# EAGLE board mcu (EAGLE 4.13)
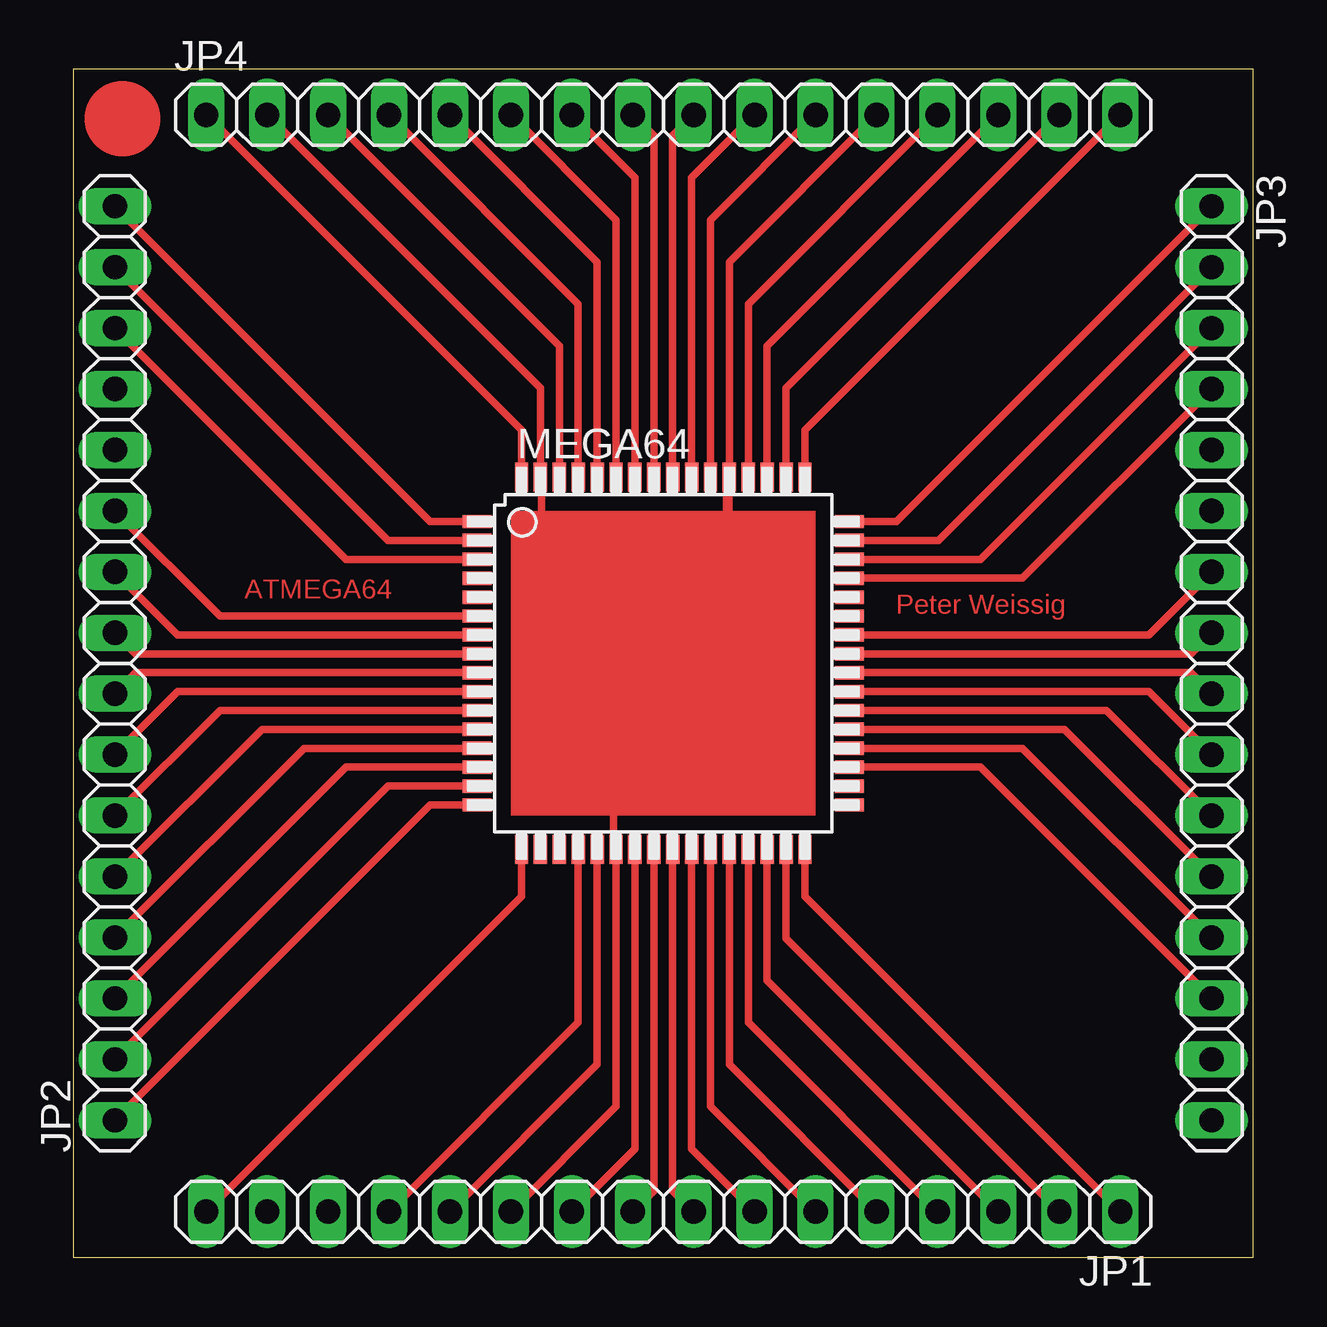
[diagram p0: board, top side]
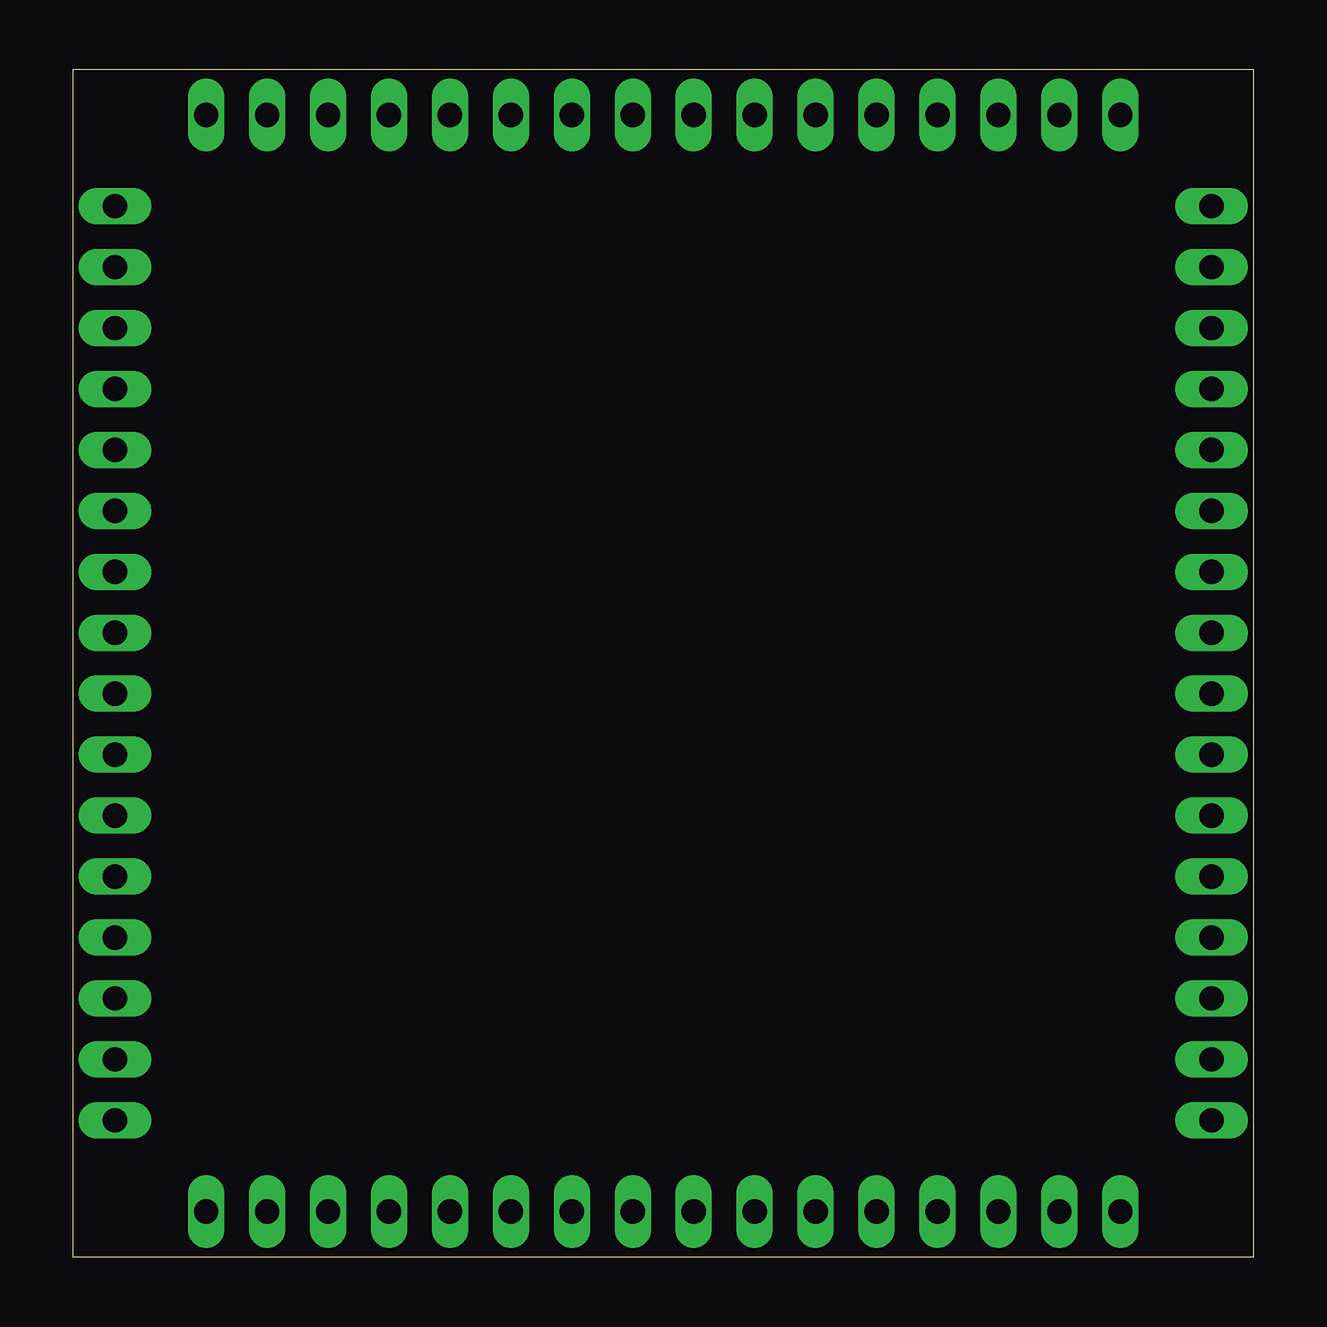
[diagram p1: board, bottom side, seen from below]

Size 49.2 x 49.52 mm. Coordinates in mm from the lower left corner, seen from the top.
Outline: 0,0 49.2,0 49.2,49.52 0,49.52 0,0
Copper layers (1*16): Top 0.035mm / dielectric 1.5mm / Bottom 0.035mm
Design rules "default": minimum track width 5mil, minimum drill 24mil, track to track 8mil, track to pad 8mil, pad to pad 8mil, via to via 8mil, smd to smd 8mil, copper to edge 8mil, drill to drill 8mil, minimum pad ring 10mil, minimum via ring 8mil, stop-mask expansion 4mil, vias tented up to drill 0mil, thermal gap 10mil

## Footprints (pad centres in the part's own frame; a part is rotated, then mirrored left to right if it is on the bottom)
1X16 = drill 1.016 long: 1 -19.05,0; 2 -16.51,0; 3 -13.97,0; 4 -11.43,0; 5 -8.89,0; 6 -6.35,0; 7 -3.81,0; 8 -1.27,0; 9 1.27,0; 10 3.81,0; 11 6.35,0; 12 8.89,0; 13 11.43,0; 14 13.97,0; 15 16.51,0; 16 19.05,0
TQFP64 = smd 1.194 x 0.559: 1 -7.76,5.905; 2 -7.76,5.118; 3 -7.76,4.331; 4 -7.76,3.543; 5 -7.76,2.756; 6 -7.76,1.968; 7 -7.76,1.181; 8 -7.76,0.394; 9 -7.76,-0.394; 10 -7.76,-1.181; 11 -7.76,-1.968; 12 -7.76,-2.756; 13 -7.76,-3.543; 14 -7.76,-4.331; 15 -7.76,-5.118; 16 -7.76,-5.905; 33 7.76,-5.905; 34 7.76,-5.118; 35 7.76,-4.331; 36 7.76,-3.543; 37 7.76,-2.756; 38 7.76,-1.968; 39 7.76,-1.181; 40 7.76,-0.394; 41 7.76,0.394; 42 7.76,1.181; 43 7.76,1.968; 44 7.76,2.756; 45 7.76,3.543; 46 7.76,4.331; 47 7.76,5.118; 48 7.76,5.905 | smd 0.559 x 1.194: 17 -5.905,-7.76; 18 -5.118,-7.76; 19 -4.331,-7.76; 20 -3.543,-7.76; 21 -2.756,-7.76; 22 -1.968,-7.76; 23 -1.181,-7.76; 24 -0.394,-7.76; 25 0.394,-7.76; 26 1.181,-7.76; 27 1.968,-7.76; 28 2.756,-7.76; 29 3.543,-7.76; 30 4.331,-7.76; 31 5.118,-7.76; 32 5.905,-7.76; 49 5.905,7.76; 50 5.118,7.76; 51 4.331,7.76; 52 3.543,7.76; 53 2.756,7.76; 54 1.968,7.76; 55 1.181,7.76; 56 0.394,7.76; 57 -0.394,7.76; 58 -1.181,7.76; 59 -1.968,7.76; 60 -2.756,7.76; 61 -3.543,7.76; 62 -4.331,7.76; 63 -5.118,7.76; 64 -5.905,7.76

## Placement (x,y rotation side)
JP1  [1X16]  24.6,1.9 180 top
JP2  [1X16]  1.74,24.76 90 top
JP3  [1X16]  47.46,24.76 270 top
JP4  [1X16]  24.6,47.62 0 top
MEGA64  [TQFP64]  24.6,24.76 0 top

## Library data of the parts
JP1-JP4 = pinhead
MEGA64 = microchip

## Nets
AVSS: JP1.13 MEGA64.20
S$2: JP1.12 MEGA64.21
S$3: JP4.2 MEGA64.63
S$4: JP4.4 MEGA64.61
S$5: JP4.5 MEGA64.60
S$6: JP4.6 MEGA64.59
S$7: JP4.7 MEGA64.58
S$8: JP4.8 MEGA64.57
S$9: JP4.9 MEGA64.56
S$10: JP4.10 MEGA64.55
S$11: JP4.11 MEGA64.54
S$12: JP4.3 MEGA64.62
S$13: JP4.12 MEGA64.53
S$14: JP4.14 MEGA64.51
S$15: JP4.15 MEGA64.50
S$16: JP4.16 MEGA64.49
S$17: JP3.1 MEGA64.48
S$18: JP3.2 MEGA64.47
S$19: JP3.3 MEGA64.46
S$20: JP3.4 MEGA64.45
S$23: JP3.7 MEGA64.42
S$24: JP3.8 MEGA64.41
S$25: JP3.9 MEGA64.40
S$26: JP3.10 MEGA64.39
S$27: JP3.11 MEGA64.38
S$28: JP3.12 MEGA64.37
S$29: JP3.13 MEGA64.36
S$33: JP1.1 MEGA64.32
S$34: JP1.2 MEGA64.31
S$35: JP1.3 MEGA64.30
S$36: JP1.4 MEGA64.29
S$37: JP1.5 MEGA64.28
S$38: JP1.7 MEGA64.26
S$39: JP1.6 MEGA64.27
S$40: JP1.9 MEGA64.24
S$41: JP1.8 MEGA64.25
S$42: JP1.10 MEGA64.23
S$43: JP1.11 MEGA64.22
S$44: JP4.13 MEGA64.52
S$46: JP1.16 MEGA64.17
S$47: JP2.1 MEGA64.16
S$48: JP2.2 MEGA64.15
S$49: JP2.3 MEGA64.14
S$50: JP2.4 MEGA64.13
S$51: JP2.5 MEGA64.12
S$52: JP2.6 MEGA64.11
S$53: JP2.7 MEGA64.10
S$54: JP2.8 MEGA64.9
S$55: JP2.9 MEGA64.8
S$56: JP2.10 MEGA64.7
S$57: JP2.11 MEGA64.6
S$60: JP2.14 MEGA64.3
S$61: JP2.15 MEGA64.2
S$62: JP2.16 MEGA64.1
S$63: JP3.14 MEGA64.35
S$66: JP4.1 MEGA64.64

## Tracks (layer width: path | path; a pad name or v marks a point on that pad's centre or on a via)
AVSS
  Top 0.305: MEGA64.20 21.06,9.79 JP1.13
S$2
  Top 0.305: MEGA64.21 21.84,8.03 JP1.12
  Bottom 1.016: 15.55,1.9 JP1.12
S$3
  Top 0.305: JP4.2 19.48,36.23 MEGA64.63 19.52,32.52
S$4
  Top 0.305: MEGA64.61 21.06,39.73 JP4.4
S$5
  Top 0.305: MEGA64.60 21.84,41.49 JP4.5
S$6
  Top 0.305: MEGA64.59 22.63,43.24 JP4.6
S$7
  Top 0.305: MEGA64.58 23.42,44.99 JP4.7
S$8
  Top 0.305: MEGA64.57 24.21,46.74 JP4.8
S$9
  Top 0.305: MEGA64.56 24.99,46.74 JP4.9
S$10
  Top 0.305: MEGA64.55 25.78,44.99 JP4.10
S$11
  Top 0.305: MEGA64.54 26.57,43.24 JP4.11
S$12
  Top 0.305: JP4.3 20.27,37.98 MEGA64.62
S$13
  Top 0.305: JP4.12 27.36,41.49 MEGA64.53
S$14
  Top 0.305: MEGA64.51 28.93,37.98 JP4.14
S$15
  Top 0.305: MEGA64.50 29.72,36.23 JP4.15
S$16
  Top 0.305: MEGA64.49 30.5,34.48 JP4.16
S$17
  Top 0.305: MEGA64.48 34.32,30.67 JP3.1
S$18
  Top 0.305: MEGA64.47 36.07,29.88 JP3.2
S$19
  Top 0.305: MEGA64.46 37.82,29.09 JP3.3
S$20
  Top 0.305: MEGA64.45 39.57,28.3 JP3.4
S$23
  Top 0.305: MEGA64.42 44.83,25.94 JP3.7
S$24
  Top 0.305: MEGA64.41 46.58,25.15 JP3.8
S$25
  Top 0.305: MEGA64.40 46.58,24.37 JP3.9
S$26
  Top 0.305: MEGA64.39 44.83,23.58 JP3.10
S$27
  Top 0.305: MEGA64.38 43.08,22.79 JP3.11
S$28
  Top 0.305: MEGA64.37 41.33,22 JP3.12
S$29
  Top 0.305: MEGA64.36 39.57,21.22 JP3.13
S$30
  Top 0.406: 27.3,30.48 27.3,32.38
S$33
  Top 0.305: MEGA64.32 30.5,15.05 JP1.1
S$34
  Top 0.305: MEGA64.31 29.72,13.29 JP1.2
S$35
  Top 0.305: MEGA64.30 28.93,11.54 JP1.3
S$36
  Top 0.305: MEGA64.29 28.14,9.79 JP1.4
S$37
  Top 0.305: MEGA64.28 27.36,8.03 JP1.5
S$38
  Top 0.305: MEGA64.26 25.78,4.53 JP1.7
S$39
  Top 0.305: MEGA64.27 26.57,6.28 JP1.6
S$40
  Top 0.305: MEGA64.24 24.21,2.78 JP1.9
S$41
  Top 0.305: MEGA64.25 24.99,2.78 JP1.8
S$42
  Top 0.305: MEGA64.23 23.42,4.53 JP1.10
S$43
  Top 0.305: MEGA64.22 22.63,6.28 JP1.11
S$44
  Top 0.305: JP4.13 28.14,39.73 MEGA64.52
  Bottom 1.016: JP4.13 36.03,47.78
S$46
  Top 0.305: MEGA64.17 18.69,15.05 JP1.16
S$47
  Top 0.305: MEGA64.16 14.88,18.85 JP2.1
S$48
  Top 0.305: MEGA64.15 13.13,19.64 JP2.2
S$49
  Top 0.305: MEGA64.14 11.38,20.43 JP2.3
S$50
  Top 0.305: MEGA64.13 9.63,21.22 JP2.4
S$51
  Top 0.305: MEGA64.12 7.87,22 JP2.5
S$52
  Top 0.305: MEGA64.11 6.12,22.79 JP2.6
S$53
  Top 0.305: MEGA64.10 4.37,23.58 JP2.7
S$54
  Top 0.305: MEGA64.9 2.62,24.37 JP2.8
S$55
  Top 0.305: MEGA64.8 2.62,25.15 JP2.9
S$56
  Top 0.305: MEGA64.7 4.37,25.94 JP2.10
S$57
  Top 0.305: MEGA64.6 6.12,26.73 JP2.11
S$60
  Top 0.305: MEGA64.3 11.38,29.09 JP2.14
S$61
  Top 0.305: MEGA64.2 13.13,29.88 JP2.15
S$62
  Top 0.305: MEGA64.1 14.88,30.67 JP2.16
S$63
  Top 0.305: MEGA64.35 37.82,20.43 JP3.14
S$64
  Top 0.305: 19.52,30.16 19.52,32.38
S$65
  Top 0.305: 22.54,17.3 22.54,18.73
S$66
  Top 0.305: JP4.1 18.69,34.48 MEGA64.64
(copper drawn outside any net)
  shapes: Top area x1, Top circle x1

## Text on the board
Top: ATMEGA64 | Peter Weissig